# Altium PCB MotherBoard.PcbDoc (part 2 of 2)
Units mil, origin at the board's own origin, x right, y up, seen from the top; angles counter-clockwise.
Board outline 4401.57 x 4960.63 mil, 2 copper layers (Top Layer, Bottom Layer), stack 63.356 mil thick; 74 components, 103 nets, 405 pads, 142 vias.
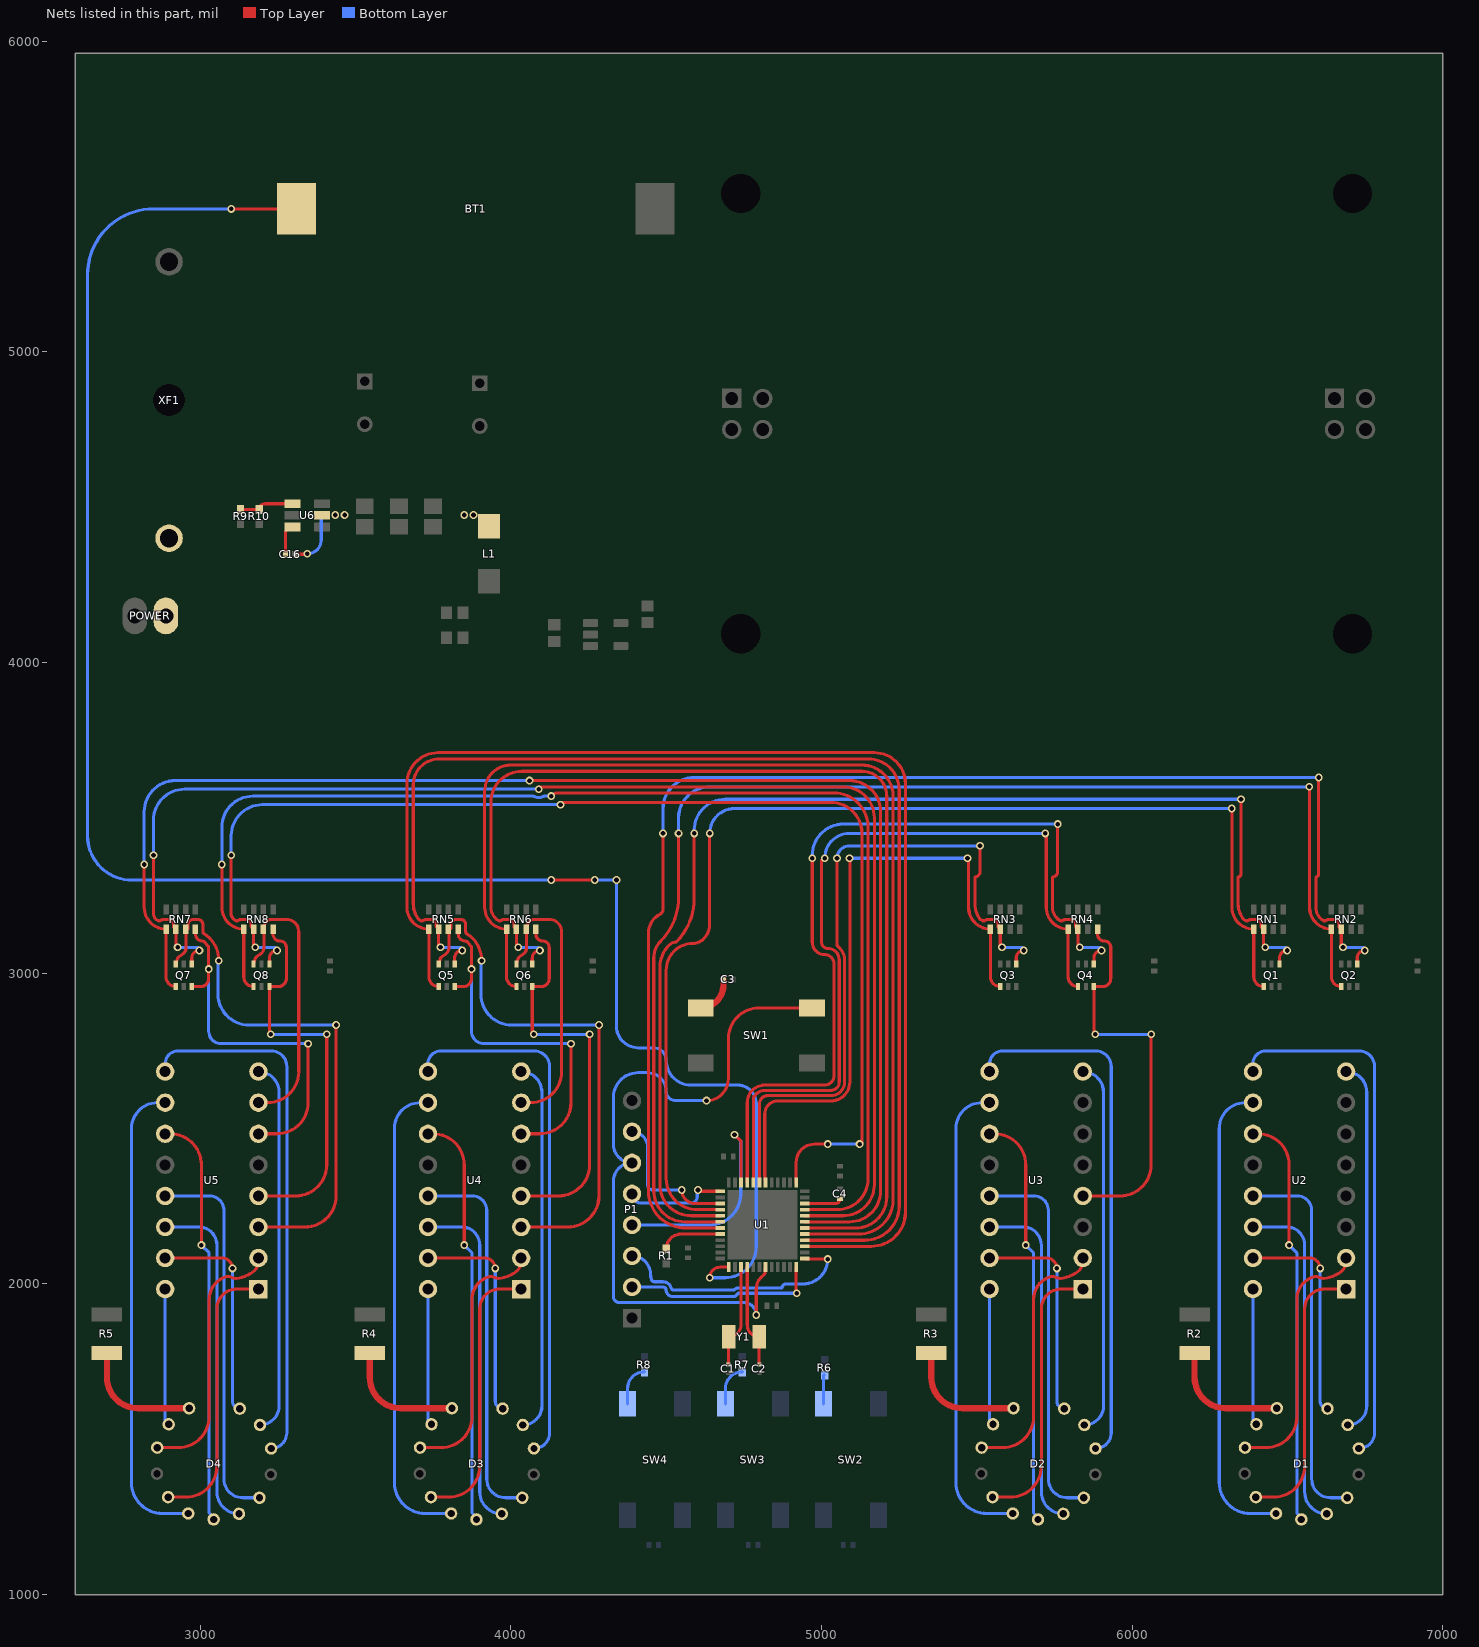
[diagram p2: the nets of this part, all layers, seen from the top]

## Via types
v1: diameter 25, hole 15, Top Layer to Bottom Layer, 142 vias

## Nets (pads, with @x,y where several pads share a name; then routed paths per layer and width w, separated by ;. In a path a pad name is that pad's centre, name@x,y a point inside that pad or via, vN(x,y) a via of type N, cw(c..) or ccw(c..) an arc to the next point about the centre after c; other vN are vias at no path point) (continued)
IC2_D: Q4.3 RN4.8 U3.4 | length 1285.6
  Top Layer w10: U3.4@5840.94,2283.39 5960.94,2283.39 ccw(c5960.94,2383.39) 6060.94,2383.39 v1(6060.94,2803.39) ; v1(5880.94,2803.39) cw(c5880.94,2807.8) 5876.54,2807.8 Q4.3@5876.54,2956.97 5904.53,2956.97 ccw(c5904.53,2983.39) 5930.94,2983.39 5930.94,3083.39 ccw(c5910.94,3083.39) 5910.94,3103.39 cw(c5910.94,3126.14) 5888.19,3126.14 RN4.8@5888.19,3141.89
  Bottom Layer w10: v1(5880.94,2803.39) v1(6060.94,2803.39)
IC3_A: Q5.6 RN5.7 U4.3 | length 1738.3
  Top Layer w10: Q5.6@3767.95,3029.8 3769.84,3035.63 3772.14,3044.42 cw(c3786.65,3040.63) 3778.01,3052.89 3789.39,3060.91 ccw(c3773.54,3083.39) 3801.04,3083.4 RN5.7@3801.04,3131.14 ; RN5.7@3799.29,3141.89 3805.91,3141.89 ccw(c3796.93,3146.3) 3806.93,3146.25 3806.93,3157.64 cw(c3821.93,3157.64) 3821.93,3172.64 3839.65,3172.64 cw(c3839.65,3157.64) 3854.65,3157.64 3854.65,3134.85 ccw(c3864.65,3134.89) 3859.26,3126.47 cw(c3805.91,3041.89) 3905.91,3041.89 v1(3905.91,3040) ; U4.3@4033.54,2183.39 4183.54,2183.39 ccw(c4183.54,2283.39) 4283.54,2283.39 v1(4283.54,2833.39)
  Bottom Layer w10: v1(3905.91,3040) 3903.54,3037.64 3903.54,2933.39 ccw(c4003.54,2933.39) 4003.54,2833.39 v1(4283.54,2833.39)
IC3_B: Q5.3 RN5.8 U4.6 | length 1200.2
  Top Layer w10: Q5.3@3819.13,2956.97 3847.13,2956.97 ccw(c3847.13,2983.39) 3873.54,2983.39 v1(3873.54,3013.39) 3873.54,3081.61 ; RN5.8@3830.79,3141.89 3830.79,3126.14 ccw(c3853.54,3126.14) 3853.39,3103.39 cw(c3853.26,3093.39) 3860.8,3099.95 3871.09,3088.13 cw(c3863.54,3081.57) 3873.54,3081.66 ; U4.6@4033.54,2483.39 4093.54,2483.39 ccw(c4093.54,2583.39) 4193.54,2583.39 v1(4193.54,2773.39)
  Bottom Layer w10: v1(3873.54,3013.39) 3873.54,2813.39 ccw(c3913.54,2813.39) 3913.54,2773.39 v1(4193.54,2773.39)
IC3_C: Q6.6 RN6.7 U4.7 | length 927.6
  Top Layer w10: Q6.6@4017.95,3029.8 4019.84,3035.63 4022.14,3044.42 cw(c4036.65,3040.63) 4028.01,3052.89 4039.39,3060.91 ccw(c4023.54,3083.39) 4051.04,3083.4 4051.04,3131.14 RN6.7@4049.29,3141.89 4051.2,3152.64 4051.2,3152.69 cw(c4080.79,3141.89) 4057.51,3163.11 ccw(c4050.1,3169.82) 4058.82,3164.93 cw(c4071.93,3157.64) 4071.93,3172.64 4072.99,3172.64 ccw(c4072.94,3182.64) 4074.8,3172.81 cw(c4080.79,3141.89) 4080.79,3173.39 4123.54,3173.39 cw(c4123.54,3133.39) 4163.54,3133.39 4163.54,2683.39 cw(c4063.54,2683.39) 4063.54,2583.39 U4.7@4033.54,2583.39
  Bottom Layer w10: U4.7@4033.54,2583.39 U4.7@4043.54,2583.39
IC3_D: Q6.3 RN6.8 U4.4 | length 1285.6
  Top Layer w10: U4.4@4033.54,2283.39 4153.54,2283.39 ccw(c4153.54,2383.39) 4253.54,2383.39 v1(4253.54,2803.39) ; v1(4073.54,2803.39) cw(c4073.54,2807.8) 4069.13,2807.8 Q6.3@4069.13,2956.97 4097.13,2956.97 ccw(c4097.13,2983.39) 4123.54,2983.39 4123.54,3083.39 ccw(c4103.54,3083.39) 4103.54,3103.39 cw(c4103.54,3126.14) 4080.79,3126.14 RN6.8@4080.79,3141.89
  Bottom Layer w10: v1(4073.54,2803.39) v1(4253.54,2803.39)
IC4_A: Q7.6 RN7.7 U5.3 | length 1738.3
  Top Layer w10: Q7.6@2922.05,3029.8 2923.94,3035.63 2926.24,3044.42 cw(c2940.75,3040.63) 2932.11,3052.89 2943.48,3060.91 ccw(c2927.64,3083.39) 2955.14,3083.4 RN7.7@2955.14,3131.14 ; RN7.7@2953.39,3141.89 2960,3141.89 ccw(c2951.02,3146.3) 2961.02,3146.25 2961.02,3157.64 cw(c2976.02,3157.64) 2976.02,3172.64 2993.74,3172.64 cw(c2993.74,3157.64) 3008.74,3157.64 3008.74,3134.85 ccw(c3018.74,3134.89) 3013.36,3126.47 cw(c2960,3041.89) 3060,3041.89 v1(3060,3040) ; U5.3@3187.64,2183.39 3337.64,2183.39 ccw(c3337.64,2283.39) 3437.64,2283.39 v1(3437.64,2833.39)
  Bottom Layer w10: v1(3060,3040) 3057.64,3037.64 3057.64,2933.39 ccw(c3157.64,2933.39) 3157.64,2833.39 v1(3437.64,2833.39)
IC4_B: Q7.3 RN7.8 U5.6 | length 1200.2
  Top Layer w10: Q7.3@2973.23,2956.97 3001.22,2956.97 ccw(c3001.22,2983.39) 3027.64,2983.39 v1(3027.64,3013.39) 3027.64,3081.61 ; RN7.8@2984.88,3141.89 2984.88,3126.14 ccw(c3007.64,3126.14) 3007.48,3103.39 cw(c3007.35,3093.39) 3014.9,3099.95 3025.18,3088.13 cw(c3017.64,3081.57) 3027.64,3081.66 ; U5.6@3187.64,2483.39 3247.64,2483.39 ccw(c3247.64,2583.39) 3347.64,2583.39 v1(3347.64,2773.39)
  Bottom Layer w10: v1(3027.64,3013.39) 3027.64,2813.39 ccw(c3067.64,2813.39) 3067.64,2773.39 v1(3347.64,2773.39)
IC4_C: Q8.6 RN8.7 U5.7 | length 927.6
  Top Layer w10: Q8.6@3172.05,3029.8 3173.94,3035.63 3176.24,3044.42 cw(c3190.75,3040.63) 3182.11,3052.89 3193.48,3060.91 ccw(c3177.64,3083.39) 3205.14,3083.4 3205.14,3131.14 RN8.7@3203.39,3141.89 3205.3,3152.64 3205.3,3152.69 cw(c3234.88,3141.89) 3211.6,3163.11 ccw(c3204.19,3169.82) 3212.92,3164.93 cw(c3226.02,3157.64) 3226.02,3172.64 3227.08,3172.64 ccw(c3227.04,3182.64) 3228.89,3172.81 cw(c3234.88,3141.89) 3234.88,3173.39 3277.64,3173.39 cw(c3277.64,3133.39) 3317.64,3133.39 3317.64,2683.39 cw(c3217.64,2683.39) 3217.64,2583.39 U5.7@3187.64,2583.39
  Bottom Layer w10: U5.7@3187.64,2583.39 U5.7@3197.64,2583.39
IC4_D: Q8.3 RN8.8 U5.4 | length 1285.6
  Top Layer w10: U5.4@3187.64,2283.39 3307.64,2283.39 ccw(c3307.64,2383.39) 3407.64,2383.39 v1(3407.64,2803.39) ; v1(3227.64,2803.39) cw(c3227.64,2807.8) 3223.23,2807.8 Q8.3@3223.23,2956.97 3251.22,2956.97 ccw(c3251.22,2983.39) 3277.64,2983.39 3277.64,3083.39 ccw(c3257.64,3083.39) 3257.64,3103.39 cw(c3257.64,3126.14) 3234.88,3126.14 RN8.8@3234.88,3141.89
  Bottom Layer w10: v1(3227.64,2803.39) v1(3407.64,2803.39)
NetBT1_2: BT1.2 U1.1 | length 6193.2
  Top Layer w10: v1(3100,5460) BT1.2@3310,5460 ; v1(4130,3300) v1(4270,3300) ; v1(4640,2020) cw(c4674,2020) 4674,2054 U1.1@4701.73,2054
  Bottom Layer w10: v1(3100,5460) 2850,5460 ccw(c2850,5247.8) 2637.8,5247.8 2637.8,4406.08 2637.8,3442.2 ccw(c2780,3442.2) 2780,3300 v1(4130,3300) ; v1(4270,3300) v1(4340,3300) 4340,2830 ccw(c4410,2830) 4410,2760 4460,2760 cw(c4460,2720) 4500,2720 ccw(c4580,2720) 4580,2640 4730,2640 cw(c4730,2580) 4790,2580 4790,2120 cw(c4690,2120) 4690,2020 v1(4640,2020)
NetC1_1: C1.1 U1.3 Y1.2 | length 339.2
  Top Layer w10: C1.1@4700,1740 4700,1829.21 cw(c4700.79,1829.21) Y1.2@4700.79,1830 ccw(c4700.79,1870.32) 4741.1,1870.32 U1.3@4741.1,2054 ccw(c4741.1,2052.9) U1.3@4740,2052.9
NetC2_1: C2.1 U1.4 Y1.1 | length 338.9
  Top Layer w10: U1.4@4759.21,2052.43 cw(c4760.79,2052.43) U1.4@4760.79,2054 4760.79,1868.43 ccw(c4799.21,1868.43) Y1.1@4799.21,1830 4799.21,1740.79 ccw(c4800,1740.79) C2.1@4800,1740
NetC3_2: C3.2 SW1.1 | length 133.3
  Top Layer w20: SW1.1@4610.87,2888.58 ccw(c4610.87,2961.97) 4684.25,2961.97 C3.2@4684.25,2980
NetC4_1: C4.1 U1.22 | length 122.8
  Top Layer w10: U1.22@4946,2258.9 5044.65,2258.9 ccw(c5044.65,2274.25) C4.1@5060,2274.25
NetC16_1: C16.1 U6.6 | length 101.2
  Top Layer w10: C16.1@3274.25,4348.42 3274.25,4412.68 cw(c3297.76,4412.68) U6.6@3297.76,4436.18
NetC16_2: C16.2 L1.1 U6.2 | length 190.8
  Top Layer w10: C16.2@3305.75,4348.42 3343.42,4348.42 ccw(c3343.42,4350) v1(3345,4350)
  Bottom Layer w10: v1(3345,4350) ccw(c3345,4395) 3390,4395 3390,4475
  other v1: 3435,4475 3465,4475 3850,4475 3880,4475
NetD1_1: D1.1 U2.15 | length 713.2
  Top Layer w10: U2.15@6380.11,2091.7 cw(c6380.11,2083.39) U2.15@6388.43,2083.39 6571.5,2083.39 cw(c6571.5,2050) v1(6604.88,2050)
  Bottom Layer w10: v1(6604.88,2050) 6604.88,1622.45 ccw(c6628.49,1622.45) D1.1@6628.49,1598.84
NetD1_2: D1.2 U2.8 | length 1223.4
  Top Layer w10: U2.8@6675.15,2683.39 U2.8@6688.43,2683.39
  Bottom Layer w10: U2.8@6688.43,2683.39 cw(c6688.43,2616.93) 6754.88,2616.93 6754.88,1607.55 cw(c6693.51,1607.55) D1.2@6693.51,1546.18
NetD1_3: D1.3 U2.9 | length 1727.2
  Bottom Layer w10: U2.9@6388.43,2683.39 6388.43,2708.54 cw(c6429.88,2708.54) 6429.88,2750 6729.88,2750 cw(c6729.88,2700) 6779.88,2700 6779.88,1521.17 cw(c6729.25,1521.17) D1.3@6729.25,1470.53
NetD1_5: D1.5 U2.13 | length 1228.8
  Bottom Layer w10: U2.13@6388.43,2283.39 6531.04,2283.39 cw(c6531.04,2237.04) 6577.38,2237.04 6577.38,1372.84 ccw(c6638.46,1372.84) 6638.46,1311.76 D1.5@6691.75,1311.76
NetD1_6: D1.6 U2.14 | length 1105.3
  Bottom Layer w10: U2.14@6388.43,2183.39 6496.5,2183.39 cw(c6496.5,2125) 6554.88,2125 6554.88,1331.15 ccw(c6625.95,1331.15) D1.6@6625.95,1260.09
NetD1_7: D1.7 U2.11 | length 1331.1
  Top Layer w10: U2.11@6388.43,2483.39 6404.88,2483.39 cw(c6404.88,2383.39) 6504.88,2383.39 v1(6504.88,2125)
  Bottom Layer w10: v1(6504.88,2125) 6529.88,2100 6529.88,1262.94 6544.24,1248.59 D1.7@6544.24,1242.08
NetD1_8: D1.8 U2.10 | length 1534.8
  Bottom Layer w10: U2.10@6388.43,2583.39 6363.27,2583.39 ccw(c6363.27,2500) 6279.88,2500 6279.88,1361.31 ccw(c6379.88,1361.31) 6379.88,1261.31 D1.8@6462.81,1261.31
NetD1_9: D1.9 U2.1 | length 890.3
  Top Layer w10: D1.9@6397.79,1313.97 6454.88,1313.97 ccw(c6454.88,1413.97) 6554.88,1413.97 6554.88,1920 cw(c6618.27,1920) 6618.27,1983.39 U2.1@6688.43,1983.39
  Bottom Layer w10: U2.1@6688.03,1983.39 U2.1@6688.43,1983.39
NetD1_11: D1.11 U2.2 | length 841.6
  Top Layer w10: D1.11@6362.68,1473.28 6429.88,1473.28 ccw(c6429.88,1573.28) 6529.88,1573.28 6529.88,1950 cw(c6606.21,1950) 6582.37,2022.51 ; 6582.38,2022.51 cw(c6590.65,1997.12) 6602.58,2021.01 ccw(c6614.97,2045.56) 6617.32,2018.16 ccw(c6608.17,2122.49) 6671.1,2038.78 ccw(c6644.88,2073.54) 6688.43,2073.54 U2.2@6688.43,2083.39
  Bottom Layer w10: U2.2@6688.43,2083.39 U2.2@6688.43,2083.86
NetD1_12: D1.12 U2.16 | length 454.6
  Top Layer w10: U2.16@6379.04,1974 U2.16@6388.43,1983.39
  Bottom Layer w10: U2.16@6388.43,1983.39 6388.43,1559.51 ccw(c6399.55,1559.51) D1.12@6399.55,1548.39
NetD1_13: D1.13 R2.2 | length 399.6
  Top Layer w20: R2.2@6200.79,1777.99 6200.79,1700.07 ccw(c6300.79,1700.07) 6300.79,1600.07 D1.13@6465.36,1600.07
NetD2_1: D2.1 U3.15 | length 713.2
  Top Layer w10: U3.15@5532.63,2091.7 cw(c5532.63,2083.39) U3.15@5540.94,2083.39 5724.02,2083.39 cw(c5724.02,2050) v1(5757.4,2050)
  Bottom Layer w10: v1(5757.4,2050) 5757.4,1622.45 ccw(c5781.01,1622.45) D2.1@5781.01,1598.84
NetD2_2: D2.2 U3.8 | length 1223.4
  Top Layer w10: U3.8@5827.67,2683.39 U3.8@5840.94,2683.39
  Bottom Layer w10: U3.8@5840.94,2683.39 cw(c5840.94,2616.93) 5907.4,2616.93 5907.4,1607.55 cw(c5846.03,1607.55) D2.2@5846.03,1546.18
NetD2_3: D2.3 U3.9 | length 1727.2
  Bottom Layer w10: U3.9@5540.94,2683.39 5540.94,2708.54 cw(c5582.4,2708.54) 5582.4,2750 5882.4,2750 cw(c5882.4,2700) 5932.4,2700 5932.4,1521.17 cw(c5881.77,1521.17) D2.3@5881.77,1470.53
NetD2_5: D2.5 U3.13 | length 1228.8
  Bottom Layer w10: U3.13@5540.94,2283.39 5683.56,2283.39 cw(c5683.56,2237.04) 5729.9,2237.04 5729.9,1372.84 ccw(c5790.98,1372.84) 5790.98,1311.76 D2.5@5844.27,1311.76
NetD2_6: D2.6 U3.14 | length 1105.3
  Bottom Layer w10: U3.14@5540.94,2183.39 5649.02,2183.39 cw(c5649.02,2125) 5707.4,2125 5707.4,1331.15 ccw(c5778.47,1331.15) D2.6@5778.47,1260.09
NetD2_7: D2.7 U3.11 | length 1331.1
  Top Layer w10: U3.11@5540.94,2483.39 5557.4,2483.39 cw(c5557.4,2383.39) 5657.4,2383.39 v1(5657.4,2125)
  Bottom Layer w10: v1(5657.4,2125) 5682.4,2100 5682.4,1262.94 5696.76,1248.59 D2.7@5696.76,1242.08
NetD2_8: D2.8 U3.10 | length 1534.8
  Bottom Layer w10: U3.10@5540.94,2583.39 5515.79,2583.39 ccw(c5515.79,2500) 5432.4,2500 5432.4,1361.31 ccw(c5532.4,1361.31) 5532.4,1261.31 D2.8@5615.33,1261.31
NetD2_9: D2.9 U3.1 | length 890.3
  Top Layer w10: D2.9@5550.31,1313.97 5607.4,1313.97 ccw(c5607.4,1413.97) 5707.4,1413.97 5707.4,1920 cw(c5770.79,1920) 5770.79,1983.39 U3.1@5840.94,1983.39
  Bottom Layer w10: U3.1@5840.55,1983.39 U3.1@5840.94,1983.39
NetD2_11: D2.11 U3.2 | length 841.6
  Top Layer w10: D2.11@5515.2,1473.28 5582.4,1473.28 ccw(c5582.4,1573.28) 5682.4,1573.28 5682.4,1950 cw(c5758.73,1950) 5734.89,2022.51 cw(c5743.17,1997.12) 5755.1,2021.01 ccw(c5767.49,2045.56) 5769.84,2018.16 ccw(c5760.69,2122.49) 5823.62,2038.78 ccw(c5797.4,2073.54) 5840.94,2073.54 U3.2@5840.94,2083.39
  Bottom Layer w10: U3.2@5840.94,2083.39 U3.2@5840.94,2083.86
NetD2_12: D2.12 U3.16 | length 454.6
  Top Layer w10: U3.16@5531.56,1974 U3.16@5540.94,1983.39
  Bottom Layer w10: U3.16@5540.94,1983.39 5540.94,1559.51 ccw(c5552.07,1559.51) D2.12@5552.07,1548.39
NetD2_13: D2.13 R3.2 | length 399.6
  Top Layer w20: R3.2@5353.31,1777.99 5353.31,1700.07 ccw(c5453.31,1700.07) 5453.31,1600.07 D2.13@5617.88,1600.07
NetD3_1: D3.1 U4.15 | length 713.2
  Top Layer w10: U4.15@3725.23,2091.7 cw(c3725.23,2083.39) U4.15@3733.54,2083.39 3916.61,2083.39 cw(c3916.61,2050) v1(3950,2050)
  Bottom Layer w10: v1(3950,2050) 3950,1622.45 ccw(c3973.61,1622.45) D3.1@3973.61,1598.84
NetD3_2: D3.2 U4.8 | length 1223.4
  Top Layer w10: U4.8@4020.27,2683.39 U4.8@4033.54,2683.39
  Bottom Layer w10: U4.8@4033.54,2683.39 cw(c4033.54,2616.93) 4100,2616.93 4100,1607.55 cw(c4038.63,1607.55) D3.2@4038.63,1546.18
NetD3_3: D3.3 U4.9 | length 1727.2
  Bottom Layer w10: U4.9@3733.54,2683.39 3733.54,2708.54 cw(c3775,2708.54) 3775,2750 4075,2750 cw(c4075,2700) 4125,2700 4125,1521.17 cw(c4074.36,1521.17) D3.3@4074.36,1470.53
NetD3_5: D3.5 U4.13 | length 1228.8
  Bottom Layer w10: U4.13@3733.54,2283.39 3876.15,2283.39 cw(c3876.15,2237.04) 3922.5,2237.04 3922.5,1372.84 ccw(c3983.58,1372.84) 3983.58,1311.76 D3.5@4036.87,1311.76
NetD3_6: D3.6 U4.14 | length 1105.3
  Bottom Layer w10: U4.14@3733.54,2183.39 3841.61,2183.39 cw(c3841.61,2125) 3900,2125 3900,1331.15 ccw(c3971.06,1331.15) D3.6@3971.06,1260.09
NetD3_7: D3.7 U4.11 | length 1331.1
  Top Layer w10: U4.11@3733.54,2483.39 3750,2483.39 cw(c3750,2383.39) 3850,2383.39 v1(3850,2125)
  Bottom Layer w10: v1(3850,2125) 3875,2100 3875,1262.94 3889.36,1248.59 D3.7@3889.36,1242.08
NetD3_8: D3.8 U4.10 | length 1534.8
  Bottom Layer w10: U4.10@3733.54,2583.39 3708.39,2583.39 ccw(c3708.39,2500) 3625,2500 3625,1361.31 ccw(c3725,1361.31) 3725,1261.31 D3.8@3807.93,1261.31
NetD3_9: D3.9 U4.1 | length 890.3
  Top Layer w10: D3.9@3742.91,1313.97 3800,1313.97 ccw(c3800,1413.97) 3900,1413.97 3900,1920 cw(c3963.39,1920) 3963.39,1983.39 U4.1@4033.54,1983.39
  Bottom Layer w10: U4.1@4033.15,1983.39 U4.1@4033.54,1983.39
NetD3_11: D3.11 U4.2 | length 841.6
  Top Layer w10: D3.11@3707.8,1473.28 3775,1473.28 ccw(c3775,1573.28) 3875,1573.28 3875,1950 cw(c3951.33,1950) 3927.49,2022.51 cw(c3935.77,1997.12) 3947.7,2021.01 ccw(c3960.09,2045.56) 3962.44,2018.16 ccw(c3953.29,2122.49) 4016.22,2038.78 ccw(c3990,2073.54) 4033.54,2073.54 U4.2@4033.54,2083.39
  Bottom Layer w10: U4.2@4033.54,2083.39 U4.2@4033.54,2083.86
NetD3_12: D3.12 U4.16 | length 454.6
  Top Layer w10: U4.16@3724.16,1974 U4.16@3733.54,1983.39
  Bottom Layer w10: U4.16@3733.54,1983.39 3733.54,1559.51 ccw(c3744.66,1559.51) D3.12@3744.66,1548.39
NetD3_13: D3.13 R4.2 | length 399.6
  Top Layer w20: R4.2@3545.91,1777.99 3545.91,1700.07 ccw(c3645.91,1700.07) 3645.91,1600.07 D3.13@3810.48,1600.07
NetD4_1: D4.1 U5.15 | length 713.2
  Top Layer w10: U5.15@2879.32,2091.7 cw(c2879.32,2083.39) U5.15@2887.64,2083.39 3070.71,2083.39 cw(c3070.71,2050) v1(3104.09,2050)
  Bottom Layer w10: v1(3104.09,2050) 3104.09,1622.45 ccw(c3127.71,1622.45) D4.1@3127.71,1598.84
NetD4_2: D4.2 U5.8 | length 1223.4
  Top Layer w10: U5.8@3174.36,2683.39 U5.8@3187.64,2683.39
  Bottom Layer w10: U5.8@3187.64,2683.39 cw(c3187.64,2616.93) 3254.09,2616.93 3254.09,1607.55 cw(c3192.73,1607.55) D4.2@3192.73,1546.18
NetD4_3: D4.3 U5.9 | length 1727.2
  Bottom Layer w10: U5.9@2887.64,2683.39 2887.64,2708.54 cw(c2929.09,2708.54) 2929.09,2750 3229.09,2750 cw(c3229.09,2700) 3279.09,2700 3279.09,1521.17 cw(c3228.46,1521.17) D4.3@3228.46,1470.53
NetD4_5: D4.5 U5.13 | length 1228.8
  Bottom Layer w10: U5.13@2887.64,2283.39 3030.25,2283.39 cw(c3030.25,2237.04) 3076.59,2237.04 3076.59,1372.84 ccw(c3137.67,1372.84) 3137.67,1311.76 D4.5@3190.96,1311.76
NetD4_6: D4.6 U5.14 | length 1105.3
  Bottom Layer w10: U5.14@2887.64,2183.39 2995.71,2183.39 cw(c2995.71,2125) 3054.09,2125 3054.09,1331.15 ccw(c3125.16,1331.15) D4.6@3125.16,1260.09
NetD4_7: D4.7 U5.11 | length 1331.1
  Top Layer w10: U5.11@2887.64,2483.39 2904.09,2483.39 cw(c2904.09,2383.39) 3004.09,2383.39 v1(3004.09,2125)
  Bottom Layer w10: v1(3004.09,2125) 3029.09,2100 3029.09,1262.94 3043.45,1248.59 D4.7@3043.45,1242.08
NetD4_8: D4.8 U5.10 | length 1534.8
  Bottom Layer w10: U5.10@2887.64,2583.39 2862.48,2583.39 ccw(c2862.48,2500) 2779.09,2500 2779.09,1361.31 ccw(c2879.09,1361.31) 2879.09,1261.31 D4.8@2962.02,1261.31
NetD4_9: D4.9 U5.1 | length 890.3
  Top Layer w10: D4.9@2897,1313.97 2954.09,1313.97 ccw(c2954.09,1413.97) 3054.09,1413.97 3054.09,1920 cw(c3117.48,1920) 3117.48,1983.39 U5.1@3187.64,1983.39
  Bottom Layer w10: U5.1@3187.24,1983.39 U5.1@3187.64,1983.39
NetD4_11: D4.11 U5.2 | length 841.6
  Top Layer w10: D4.11@2861.89,1473.28 2929.09,1473.28 ccw(c2929.09,1573.28) 3029.09,1573.28 3029.09,1950 cw(c3105.42,1950) 3081.58,2022.51 cw(c3089.86,1997.12) 3101.79,2021.01 ccw(c3114.18,2045.56) 3116.54,2018.16 ccw(c3107.38,2122.49) 3170.31,2038.78 ccw(c3144.09,2073.54) 3187.64,2073.54 U5.2@3187.64,2083.39
  Bottom Layer w10: U5.2@3187.64,2083.39 U5.2@3187.64,2083.86
NetD4_12: D4.12 U5.16 | length 454.6
  Top Layer w10: U5.16@2878.25,1974 U5.16@2887.64,1983.39
  Bottom Layer w10: U5.16@2887.64,1983.39 2887.64,1559.51 ccw(c2898.76,1559.51) D4.12@2898.76,1548.39
NetD4_13: D4.13 R5.2 | length 399.6
  Top Layer w20: R5.2@2700,1777.99 2700,1700.07 ccw(c2800,1700.07) 2800,1600.07 D4.13@2964.57,1600.07
NetJ3_1: POWER.1 XF1.1
NetQ1_1: Q1.1 RN1.5 U1.40 | length 3777.4
  Top Layer w10: v1(4640,3450) 4640,3158.28 cw(c4571.72,3158.28) 4620,3110 cw(c4585.86,3144.14) 4585.79,3095.86 ccw(c4585.86,3010) 4500,3010 4500,2339.21 ccw(c4600,2339.21) 4600,2239.21 U1.40@4674,2239.21 ; v1(6320,3530) cw(c6320,3529.21) 6320.79,3529.21 6320.79,3212.28 ccw(c6391.18,3212.28) RN1.5@6391.18,3141.89 6391.18,2988.62 ccw(c6422.83,2988.62) Q1.1@6422.83,2956.97
  Bottom Layer w10: v1(4640,3450) cw(c4720,3450) 4720,3530 v1(6320,3530)
NetQ1_4: Q1.4 RN1.6 U1.41 | length 3925.3
  Top Layer w10: 4590,3240 cw(c4392.04,3240) 4534.77,3102.82 cw(c4527.59,3109.79) 4528.69,3099.85 4528.64,3099.84 ccw(c4532.02,3067.8) 4509.24,3090.58 ccw(c4579.82,3020) 4480,3020 4480,2319.53 ccw(c4580,2319.53) 4580,2219.53 U1.41@4674,2219.53 ; 4590,3240.04 v1(4590,3450) ; v1(6350,3560) 6350,3319.21 cw(c6340.79,3319.21) 6340.79,3310 6340.79,3223.78 ccw(c6422.68,3223.78) 6355.52,3176.92 ccw(c6363.69,3182.69) 6356.8,3175.44 ccw(c6391.18,3212.28) 6363.3,3170.3 ccw(c6368.79,3178.66) 6374.17,3170.23 cw(c6382.32,3157.64) 6382.32,3172.64 6400.04,3172.64 cw(c6400.04,3157.64) 6415.04,3157.64 6415.04,3151.56 ccw(c6425.04,3151.61) 6416.31,3146.72 6418.82,3146.72 RN1.6@6422.68,3141.89 6422.68,3089.13 ccw(c6428.43,3089.13) v1(6428.43,3083.39) ; Q1.4@6474.02,3029.8 6474.02,3048.98 cw(c6498.43,3048.98) v1(6498.43,3073.39)
  Bottom Layer w10: v1(4590,3450) 4590,3460 cw(c4690,3460) 4690,3560 v1(6350,3560) ; v1(6428.43,3083.39) 6488.43,3083.39 cw(c6488.43,3073.39) v1(6498.43,3073.39)
NetQ2_1: Q2.1 RN2.5 U1.42 | length 4281.4
  Top Layer w10: 4540,3243.14 cw(c4341.42,3243.14) 4481.82,3102.7 ccw(c4534.55,3050) 4460,3050 4460,2299.84 ccw(c4560,2299.84) 4560,2199.84 U1.42@4674,2199.84 ; 4540,3243.18 v1(4540,3450) ; v1(6570,3600) 6570,3310.79 ccw(c6570.79,3310.79) 6570.79,3310 6570.79,3212.28 ccw(c6641.18,3212.28) RN2.5@6641.18,3141.89 6641.18,2988.62 ccw(c6672.83,2988.62) Q2.1@6672.83,2956.97
  Bottom Layer w10: v1(4540,3450) 4540,3500 cw(c4640,3500) 4640,3600 v1(6570,3600)
NetQ2_4: Q2.4 RN2.6 U1.43 | length 4463.2
  Top Layer w10: v1(4490,3450) 4490,3206.49 cw(c4471.36,3206.52) 4480,3190 ccw(c4511.43,3129.22) 4443,3129.22 4443,3129.15 4443,2299.84 ccw(c4562.69,2299.84) 4562.69,2180.16 U1.43@4674,2180.16 ; v1(6600,3630) 6600,3319.21 cw(c6590.79,3319.21) 6590.79,3310 6590.79,3212.28 ccw(c6641.18,3212.28) 6613.3,3170.3 ccw(c6618.79,3178.66) 6624.17,3170.23 cw(c6632.32,3157.64) 6632.32,3172.64 6650.04,3172.64 cw(c6650.04,3157.64) 6665.04,3157.64 6665.04,3151.56 ccw(c6675.04,3151.61) 6666.3,3146.75 6668.82,3146.75 RN2.6@6672.68,3141.89 6672.68,3089.13 ccw(c6678.43,3089.13) v1(6678.43,3083.39) ; Q2.4@6724.02,3029.8 6724.02,3048.98 cw(c6748.43,3048.98) v1(6748.43,3073.39)
  Bottom Layer w10: v1(4490,3450) 4490,3530 cw(c4590,3530) 4590,3630 v1(6600,3630) ; v1(6678.43,3083.39) 6738.43,3083.39 cw(c6738.43,3073.39) v1(6748.43,3073.39)
NetQ3_1: Q3.1 RN3.5 U1.30 | length 2128.3
  Top Layer w10: U1.30@4819.84,2326 4818.84,2333.11 4818.16,2333.11 cw(c4828.16,2333.49) 4818.16,2333.44 4818.16,2342 ccw(c4806.16,2342) 4817.6,2345.61 cw(c4827.16,2348.56) 4817.16,2348.51 4817.16,2547.16 cw(c4859,2547.16) 4859,2589 5030,2589 ccw(c5030,2650) 5091,2650 5091,3369 ccw(c5090,3369) v1(5090,3370) ; v1(5470,3370) cw(c5470,3366.69) 5473.31,3366.69 5473.31,3212.28 ccw(c5543.7,3212.28) RN3.5@5543.7,3141.89 5543.7,2988.62 ccw(c5575.35,2988.62) Q3.1@5575.35,2956.97
  Bottom Layer w10: v1(5090,3370) v1(5470,3370)
NetQ3_4: Q3.4 RN3.6 U1.31 | length 2310.1
  Top Layer w10: U1.31@4800.16,2326 4800.16,2580 cw(c4826.16,2580) 4826.16,2606 5030,2606 ccw(c5030,2650) 5074,2650 5074,3043 ccw(c5020,3043) 5053.71,3085.19 cw(c5060,3092.96) 5050,3092.92 v1(5050,3370) ; v1(5510,3410) 5510,3326.69 cw(c5493.31,3326.69) 5493.31,3310 5493.31,3223.78 ccw(c5575.2,3223.78) 5508.04,3176.92 ccw(c5516.21,3182.69) 5509.32,3175.44 ccw(c5543.7,3212.28) 5515.82,3170.3 ccw(c5521.31,3178.66) 5526.69,3170.23 cw(c5534.84,3157.64) 5534.84,3172.64 5552.56,3172.64 cw(c5552.56,3157.64) 5567.56,3157.64 5567.56,3151.56 ccw(c5577.56,3151.61) 5568.83,3146.72 5571.34,3146.72 RN3.6@5575.2,3141.89 5575.2,3089.13 ccw(c5580.94,3089.13) v1(5580.94,3083.39) ; Q3.4@5626.54,3029.8 5626.54,3048.98 cw(c5650.94,3048.98) v1(5650.94,3073.39)
  Bottom Layer w10: v1(5050,3370) cw(c5090,3370) 5090,3410 v1(5510,3410) ; v1(5580.94,3083.39) 5640.94,3083.39 cw(c5640.94,3073.39) v1(5650.94,3073.39)
NetQ4_1: Q4.1 RN4.5 U1.32 | length 2641.3
  Top Layer w10: U1.32@4780.47,2326 4780.47,2595.77 cw(c4790.47,2595.72) 4781.36,2599.84 cw(c4817.38,2583.4) 4817.38,2623 5030,2623 ccw(c5030,2650) 5057,2650 5057,3043 ccw(c5020,3043) 5020,3080 cw(c5020,3100) 5000,3100 5000,3360 cw(c5010,3360) v1(5010,3370) ; v1(5720,3450) cw(c5720,3446.69) 5723.31,3446.69 5723.31,3212.28 ccw(c5793.7,3212.28) RN4.5@5793.7,3141.89 5793.7,2988.62 ccw(c5825.35,2988.62) Q4.1@5825.35,2956.97
  Bottom Layer w10: v1(5010,3370) cw(c5090,3370) 5090,3450 v1(5720,3450)
NetQ4_4: Q4.4 RN4.6 U1.33 | length 2786.2
  Top Layer w10: U1.33@4760.79,2326 4760.79,2583.4 cw(c4817.38,2583.4) 4817.38,2640 5010,2640 ccw(c5010,2670) 5040,2670 5040,3030 ccw(c5010,3030) 5010,3060 cw(c5010,3100) 4970,3100 v1(4970,3370) ; v1(5760,3480) 5760,3326.69 cw(c5743.31,3326.69) 5743.31,3310 5743.31,3212.28 ccw(c5793.7,3212.28) 5765.82,3170.3 ccw(c5771.31,3178.66) 5776.69,3170.23 cw(c5784.84,3157.64) 5784.84,3172.64 5802.56,3172.64 cw(c5802.56,3157.64) 5817.56,3157.64 5817.56,3151.56 ccw(c5827.56,3151.61) 5818.82,3146.75 5821.34,3146.75 RN4.6@5825.2,3141.89 5825.2,3089.13 ccw(c5830.94,3089.13) v1(5830.94,3083.39) ; Q4.4@5876.54,3029.8 5876.54,3048.98 cw(c5900.94,3048.98) v1(5900.94,3073.39)
  Bottom Layer w10: v1(4970,3370) 4970,3380 cw(c5070,3380) 5070,3480 v1(5760,3480) ; v1(5830.94,3083.39) 5890.94,3083.39 cw(c5890.94,3073.39) v1(5900.94,3073.39)
NetQ5_1: Q5.1 RN5.5 U1.15 | length 4195.2
  Top Layer w10: Q5.1@3767.95,2956.97 cw(c3767.95,2988.62) 3736.3,2988.62 RN5.5@3736.3,3141.89 cw(c3736.3,3212.28) 3665.91,3212.28 3665.91,3610 cw(c3765.91,3610) 3765.91,3710 5170,3710 cw(c5170,3610) 5270,3610 5270,2231.1 cw(c5160,2231.1) 5160,2121.1 U1.15@4946,2121.1
NetQ5_4: Q5.4 RN5.6 U1.16 | length 4093.7
  Top Layer w10: v1(3773.54,3083.39) cw(c3773.54,3089.13) 3767.8,3089.13 RN5.6@3767.8,3141.89 3763.94,3146.72 3761.43,3146.72 cw(c3770.16,3151.61) 3760.16,3151.56 3760.16,3157.64 ccw(c3745.16,3157.64) 3745.16,3172.64 3727.44,3172.64 ccw(c3727.44,3157.64) 3719.29,3170.23 cw(c3713.91,3178.66) 3708.42,3170.3 cw(c3736.3,3212.28) 3701.91,3175.44 cw(c3708.8,3182.69) 3700.64,3176.92 cw(c3767.8,3223.78) 3685.91,3223.78 3685.91,3605.91 cw(c3770,3605.91) 3770,3690 5150,3690 cw(c5150,3590) 5250,3590 5250,2250.79 cw(c5140,2250.79) 5140,2140.79 U1.16@4946,2140.79 ; Q5.4@3819.13,3029.8 3819.13,3048.98 cw(c3843.54,3048.98) v1(3843.54,3073.39)
  Bottom Layer w10: v1(3773.54,3083.39) 3833.54,3083.39 cw(c3833.54,3073.39) v1(3843.54,3073.39)
NetQ6_1: Q6.1 RN6.5 U1.17 | length 3752.7
  Top Layer w10: Q6.1@4017.95,2956.97 cw(c4017.95,2988.62) 3986.3,2988.62 RN6.5@3986.3,3141.89 cw(c3986.3,3212.28) 3915.91,3212.28 3915.91,3585.91 cw(c4000,3585.91) 4000,3670 5130,3670 cw(c5130,3570) 5230,3570 5230,2270.47 cw(c5120,2270.47) 5120,2160.47 U1.17@4946,2160.47
NetQ6_4: Q6.4 RN6.6 U1.18 | length 3651.3
  Top Layer w10: v1(4023.54,3083.39) cw(c4023.54,3089.13) 4017.8,3089.13 RN6.6@4017.8,3141.89 4013.94,3146.75 4011.41,3146.75 cw(c4020.16,3151.61) 4010.16,3151.56 4010.16,3157.64 ccw(c3995.16,3157.64) 3995.16,3172.64 3977.44,3172.64 ccw(c3977.44,3157.64) 3969.29,3170.23 cw(c3963.91,3178.66) 3958.42,3170.3 cw(c3986.3,3212.28) 3935.91,3212.28 3935.91,3550 cw(c4035.91,3550) 4035.91,3650 5130,3650 cw(c5130,3570) 5210,3570 5210,2280.16 cw(c5110,2280.16) 5110,2180.16 U1.18@4946,2180.16 ; Q6.4@4069.13,3029.8 4069.13,3048.98 cw(c4093.54,3048.98) v1(4093.54,3073.39)
  Bottom Layer w10: v1(4023.54,3083.39) 4083.54,3083.39 cw(c4083.54,3073.39) v1(4093.54,3073.39)
NetQ7_1: Q7.1 RN7.5 U1.19 | length 4626.7
  Top Layer w10: v1(2820,3350) 2820,3212.28 ccw(c2890.39,3212.28) RN7.5@2890.39,3141.89 2890.39,2988.62 ccw(c2922.05,2988.62) Q7.1@2922.05,2956.97 ; v1(4060,3620) 5090,3620 cw(c5090,3520) 5190,3520 5190,2299.84 cw(c5090,2299.84) 5090,2199.84 U1.19@4946,2199.84
  Bottom Layer w10: v1(2820,3350) 2820,3520 cw(c2920,3520) 2920,3620 v1(4060,3620)
NetQ7_4: Q7.4 RN7.6 U1.20 | length 4506.1
  Top Layer w10: v1(2850,3380) 2850,3193.79 ccw(c2881.01,3193.79) 2856.01,3175.44 ccw(c2890.39,3212.28) 2862.51,3170.3 ccw(c2868.01,3178.66) 2873.39,3170.23 cw(c2881.54,3157.64) 2881.54,3172.64 2899.25,3172.64 cw(c2899.25,3157.64) 2914.25,3157.64 2914.25,3151.56 ccw(c2924.25,3151.61) 2915.53,3146.72 2918.03,3146.72 RN7.6@2921.89,3141.89 2921.89,3089.13 ccw(c2927.64,3089.13) v1(2927.64,3083.39) ; Q7.4@2973.23,3029.8 2973.23,3048.98 cw(c2997.64,3048.98) v1(2997.64,3073.39) ; v1(4090,3592.5) 4090,3600 5070,3600 cw(c5070,3500) 5170,3500 5170,2319.53 cw(c5070,2319.53) 5070,2219.53 U1.20@4946,2219.53
  Bottom Layer w10: v1(2850,3380) 2850,3492.5 cw(c2950,3492.5) 2950,3592.5 v1(4090,3592.5) ; v1(2927.64,3083.39) 2987.64,3083.39 cw(c2987.64,3073.39) v1(2997.64,3073.39)
NetQ8_1: Q8.1 RN8.5 U1.21 | length 4168.9
  Top Layer w10: v1(3070,3350) 3070,3212.28 ccw(c3140.39,3212.28) RN8.5@3140.39,3141.89 3140.39,2988.62 ccw(c3172.05,2988.62) Q8.1@3172.05,2956.97 ; v1(4130,3570) 4133.36,3570 4143.36,3580 5040,3580 cw(c5040,3470) 5150,3470 5150,2339.21 cw(c5050,2339.21) 5050,2239.21 U1.21@4946,2239.21
  Bottom Layer w10: v1(3070,3350) 3070,3470 cw(c3170,3470) 3170,3570 4071.34,3570 cw(c4071.29,3560) 4076.25,3568.69 ccw(c4090,3592.5) 4103.76,3568.69 cw(c4108.71,3560) 4108.66,3570 v1(4130,3570)
NetQ8_4: Q8.4 RN8.6 U1.25 | length 4008.8
  Top Layer w10: v1(3100,3380) 3100,3195.05 3099.51,3194.56 ccw(c3128.62,3194.56) 3112.51,3170.3 ccw(c3118.01,3178.66) 3123.39,3170.23 cw(c3131.54,3157.64) 3131.54,3172.64 3149.25,3172.64 cw(c3149.25,3157.64) 3164.25,3157.64 3164.25,3151.56 ccw(c3174.25,3151.61) 3165.51,3146.75 3168.03,3146.75 RN8.6@3171.89,3141.89 3171.89,3089.13 ccw(c3177.64,3089.13) v1(3177.64,3083.39) ; Q8.4@3223.23,3029.8 3223.23,3048.98 cw(c3247.64,3048.98) v1(3247.64,3073.39) ; v1(4160,3542.5) 4160,3550 5030,3550 cw(c5030,3450) 5130,3450 v1@5130,2450 ; U1.25@4918.27,2326 ccw(c4918.27,2327.73) U1.25@4920,2327.73 ; U1.25@4918.27,2327.73 4918.27,2391.42 cw(c4976.85,2391.42) 4976.85,2450 v1(5020,2450)
  Bottom Layer w10: v1(3100,3380) 3100,3442.5 cw(c3200,3442.5) 3200,3542.5 v1(4160,3542.5) ; v1(3177.64,3083.39) 3237.64,3083.39 cw(c3237.64,3073.39) v1(3247.64,3073.39) ; v1(5020,2450) v1(5122.5,2450)
NetR1_2: R1.2 U1.44 | length 201.3
  Top Layer w10: R1.2@4500,2112.64 cw(c4547.83,2112.64) 4547.83,2160.47 U1.44@4674,2160.47
NetR6_1: R6.1 SW2.4 | length 95.6
  Bottom Layer w10: SW2.4@5005.83,1614.13 5005.83,1703.19 cw(c5010,1703.19) R6.1@5010,1707.36
NetR7_1: R7.1 SW3.4 | length 134.2
  Bottom Layer w10: SW3.4@4690.83,1614.13 4690.83,1663.19 cw(c4745,1663.19) R7.1@4745,1717.36
NetR8_1: R8.1 SW4.4 | length 134.2
  Bottom Layer w10: SW4.4@4375.83,1614.13 4375.83,1663.19 cw(c4430,1663.19) R8.1@4430,1717.36
NetR9_1: R9.1 R10.2 U6.4 | length 178.2
  Top Layer w10: R9.1@3130,4492.64 R10.2@3190,4492.64 cw(c3208.35,4492.64) 3208.35,4510.98 U6.4@3297.76,4510.98
ST_NRST: P1.6 SW1.2 U1.7 | length 2332.5
  Top Layer w10: v1(4630,2590) ccw(c4630,2660) 4700,2660 4700,2788.58 cw(c4800,2788.58) 4800,2888.58 SW1.2@4969.13,2888.58 ; v1(4790,1900) 4790,1983.47 ; 4790,1983.52 cw(c4844.79,1983.52) 4813.1,2028.21 ccw(c4806.16,2038) 4818.16,2038 4818.16,2048.44 cw(c4828.16,2048.44) 4818.26,2049.86 4818.84,2049.86 U1.7@4819.84,2054
  Bottom Layer w10: v1(4630,2590) 4530,2590 cw(c4530,2620) 4500,2620 ccw(c4440,2620) 4440,2680 4410,2680 ccw(c4410,2600) 4330,2600 4330,2450 ccw(c4390,2450) P1.6@4390,2390 ccw(c4390,2330) 4330,2330 4330,1960 ccw(c4350,1960) 4350,1940 4750,1940 cw(c4750,1900) v1(4790,1900) v1@4787.13,1902.87
ST_SWCLK: P1.5 U1.37 | length 335.5
  Top Layer w10: v1(4602.23,2302.23) 4606.29,2302.23 4610.24,2298.27 U1.37@4674,2298.27
  Bottom Layer w10: P1.5@4390,2290 ccw(c4420,2290) 4420,2260 4580,2260 ccw(c4580,2280) 4600,2280 4600,2300 cw(c4602.23,2300) v1(4602.23,2302.23)
ST_SWDIO: P1.4 U1.34 | length 768.1
  Top Layer w10: v1(4720,2480) 4741.1,2458.9 U1.34@4741.1,2326
  Bottom Layer w10: P1.4@4390,2190 4640,2190 ccw(c4640,2290) 4740,2290 4740,2460 v1(4720,2480)
ST_SWO: P1.7 U1.39 | length 467.4
  Top Layer w10: v1(4550,2302.23) ccw(c4593.33,2302.23) 4593.33,2258.9 U1.39@4674,2258.9
  Bottom Layer w10: P1.7@4390,2490 cw(c4390,2440) 4440,2440 4440,2320 ccw(c4457.77,2320) 4457.77,2302.23 v1(4550,2302.23)
ST_USART_RX: P1.3 U1.13 | length 822.9
  Top Layer w10: U1.13@4946,2081.73 4946.87,2080.87 5019.13,2080.87 v1(5020,2080)
  Bottom Layer w10: P1.3@4390,2090 cw(c4390,2030) 4450,2030 ccw(c4500,2030) 4452.73,2013.69 ccw(c4462.17,2017) 4462.13,2007 4490,2007 cw(c4490,1980) 4516.01,1987.26 ccw(c4525.62,1990) 4525.58,1980 4713.89,1980 ccw(c4713.84,1990) 4720.54,1982.57 cw(c4731.98,1970) 4731.98,1987 4872.86,1987 cw(c4885.86,1987) 4885.86,2000 4940,2000 ccw(c4940,2080) v1(5020,2080)
ST_USART_TX: P1.2 U1.12 | length 636.3
  Top Layer w10: U1.12@4918.27,2054 4918.27,1971.73 ccw(c4920,1971.73) v1(4920,1970)
  Bottom Layer w10: P1.2@4390,1990 4490,1990 cw(c4490,1980) 4500,1980 ccw(c4520,1980) 4520,1960 4721.98,1960 4731.98,1970 v1(4920,1970)
pads on no net: D1.4 D1.10 D2.4 D2.10 D3.4 D3.10 D4.4 D4.10 SW2.2 SW3.2 SW4.2 U1.2 U1.5 U1.6 U1.10 U1.11 U1.14 U1.28 U1.38 U1.45 U1.46 U7.4 XF1.MH1

## Polygon pours and split planes (outlines as drawn)
GND on Top Layer "GND_L01_P020" (solid, pour order 20): 2598.43,5960.63 7000,5960.63 7000,1000 2598.43,1000
+12 on Top Layer "+12_L01_P018" (solid, pour order 18): 4050,4795 4225,4795 4225,4870 4550,4870 4550,4595 4050,4595
NetJ3_1 on Top Layer "NETJ3_1_L01_P017" (solid, pour order 17): 2850,4445 2850,4045 3050,4045 3050,4445
+12 on Top Layer "+12_L01_P015" (solid, pour order 15): 2725,5320 3075,5320 3075,4795 4050,4795 4050,4595 2725,4595
+12 on Top Layer "+12_L01_P000" (solid, pour order 0): 3375,4500 3800,4500 3800,4610 3375,4610
NetC16_2 on Top Layer "NETC16_2_L01_P002" (solid, pour order 2): 3385,4460 3480,4460 3480,4490 3385,4490
NetC16_2 on Top Layer "NETC16_2_L01_P003" (solid, pour order 3): 3970,4460 3835,4460 3835,4490 3970,4490
+5 on Top Layer "+5_L01_P004" (solid, pour order 4): 4020,4300 3830,4300 3830,4030 4020,4030
GND on Top Layer "GND_L01_P005" (solid, pour order 5): 3370,4450 3780,4450 3780,4200 3810,4200 3810,4050 3370,4050
+5 on Top Layer "+5_L01_P006" (solid, pour order 6): 4265,4115 4265,4140 3995,4140 3995,4115
GND on Top Layer "GND_L01_P008" (solid, pour order 8): 4275,4080 4275,4105 4195,4105 4195,4085 4065,4085 4065,4045 4215,4045 4215,4080
GND on Bottom Layer "GND_L02_P019" (solid, pour order 19): 2598.43,5960.63 7000,5960.63 7000,1000 2598.43,1000
NetC16_2 on Bottom Layer "NETC16_2_L02_P001" (solid, pour order 1): 3370,4460 3370,4490 3970,4490 3970,4460

## Silkscreen, mask and mechanical layers (free items; w line width, h text height)
Top Overlay:
  drawing of 2 lines, arcs and shapes, not listed
  text "JLCJLCJLCJLC" at 5180,4770 h30
  text "- +" at 2750,3960 h60
  text "GND" at 4209.97,2570 h40
  text "SWO" at 4209.97,2470 h40
  text "RST" at 4209.97,2370 h40
  text "SWCLK" at 4130,2270 h40
  text "SWDIO" at 4136.66,2170 h40
  text "RX" at 4249.96,2070 h40
  text "TX" at 4249.96,1970 h40
  text "VCC" at 4209.97,1870 h40
Bottom Overlay:
  drawing of 8 lines, arcs and shapes, not listed
  text "NIXIE CLOCK" at 6360,4340 h120
  text "Designed by Jakub Sztuka, 2023 / github.com/sztvka" at 6360,4080 h60

## Text inside footprints (layer, text, board x,y; h text height)
U1: Top 3D Body "*" at 4716.89,2057.5 h50 r90; Top Overlay "*" at 4700,1990 h50 r90